# Altium PCB 第二版PCB.pcbdoc (part 1 of 2)
Units mm, origin at the board's own origin, x right, y up, seen from the top; angles counter-clockwise.
Board outline 100 x 24 mm, 4 copper layers (Top Layer, GND, VCC, Bottom Layer), stack 0.568 mm thick; 97 components, 63 nets, 363 pads, 297 vias.
Unrouted connection lines stored in the file: 80.
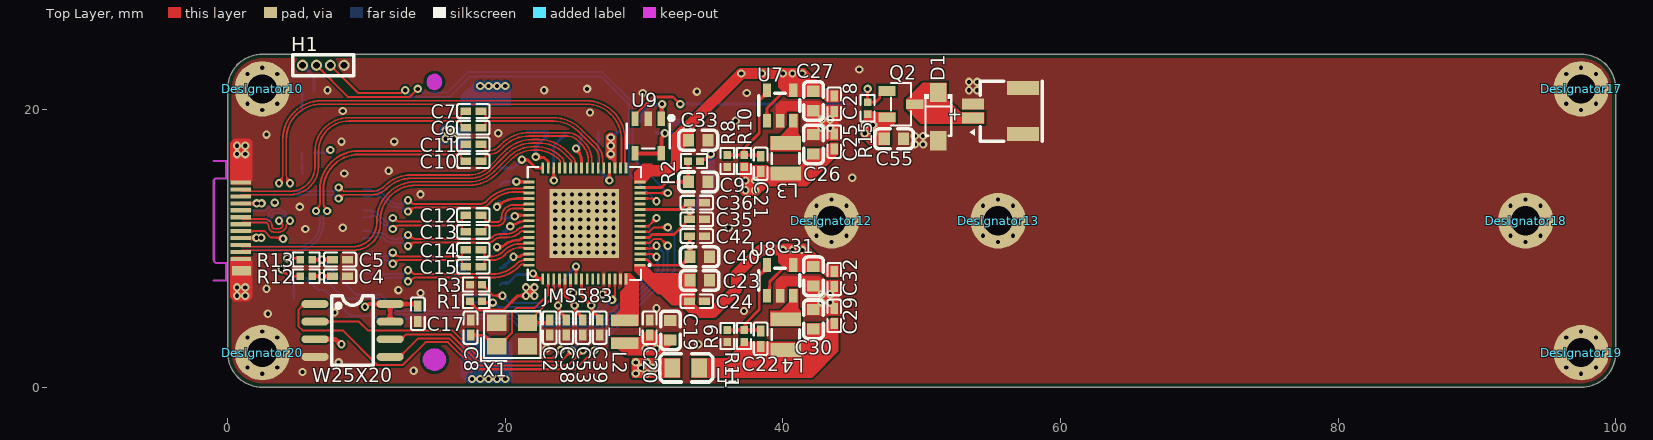
[diagram p0: Top Layer view]
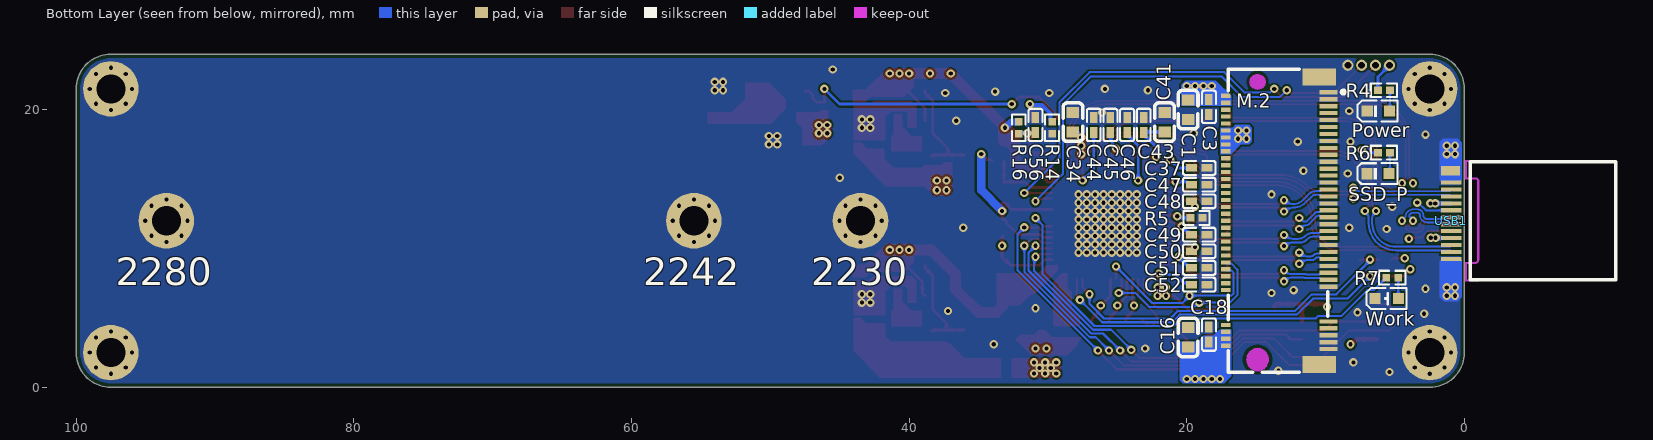
[diagram p1: Bottom Layer view, seen from below]
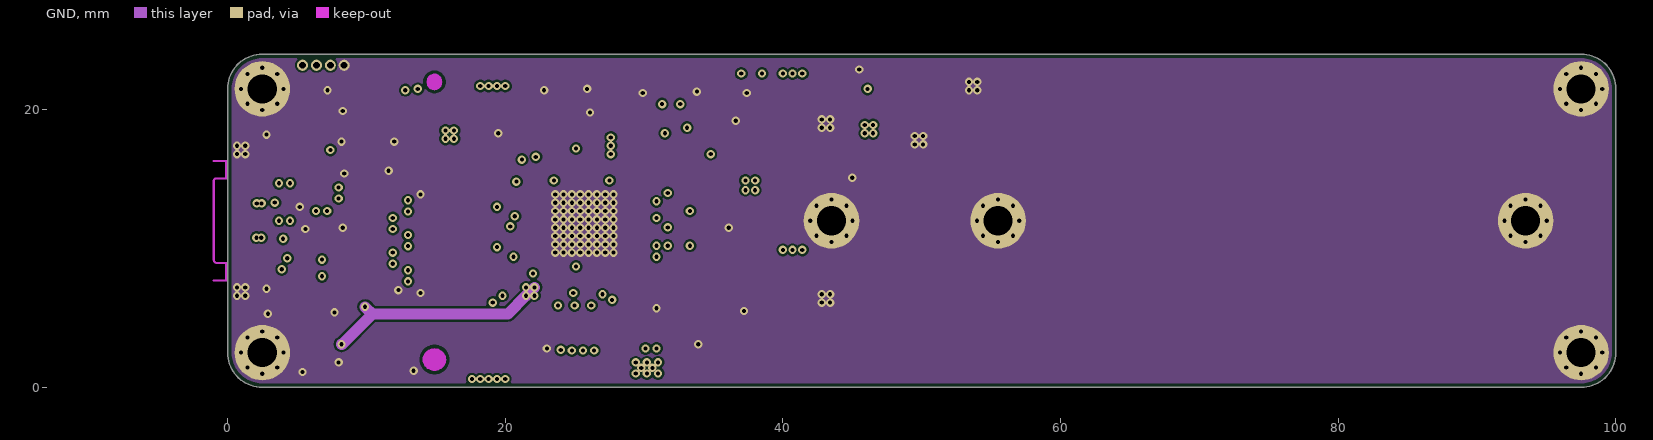
[diagram p2: GND]
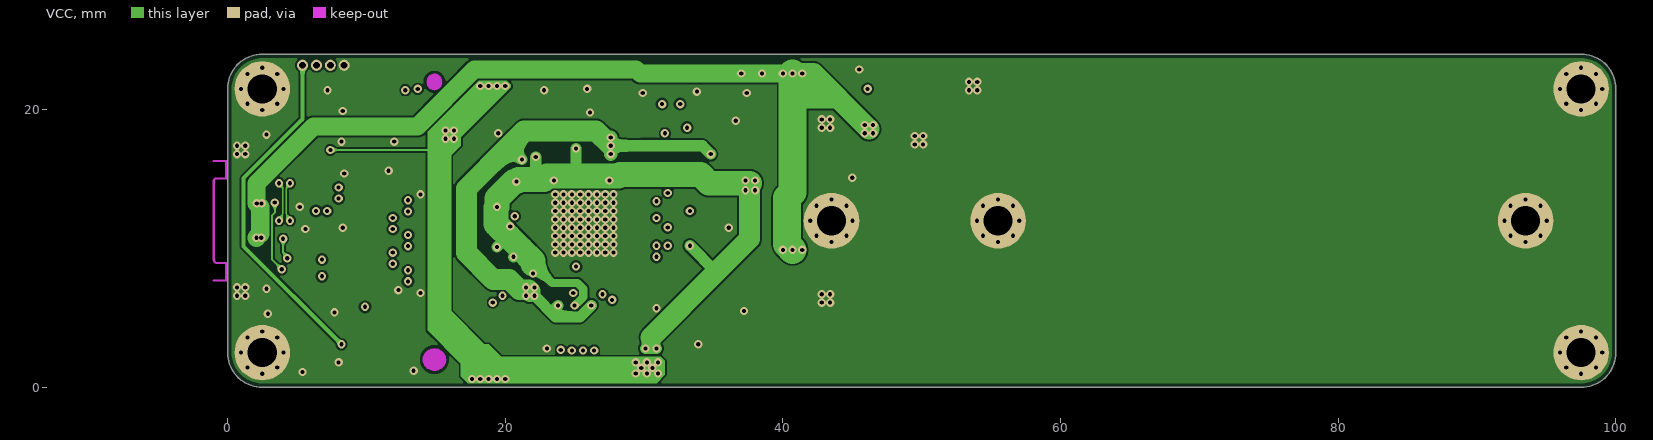
[diagram p3: VCC]

## Layer stack, top to bottom
Top Solder Mask Layer: solder mask 0.0102, Solder Resist, Dk 3.5
Top Layer: signal copper 0.035
Dielectric 1: prepreg 0.0711, PP-006, Dk 4.1
GND: signal copper 0.018
Dielectric1: dielectric 0.32, FR-4, Dk 4.8
VCC: signal copper 0.018
Dielectric 2: prepreg 0.0711, PP-006, Dk 4.1
Bottom Layer: signal copper 0.035
Bottom Solder Mask Layer: solder mask 0.0102, Solder Resist, Dk 3.5

## Board outline
0,2.5 0,21.5 cw(c2.5,21.5) 2.5,24 97.5,24 cw(c97.5,21.5) 100,21.5 100,2.5 cw(c97.5,2.5) 97.5,0 2.5,0 cw(c2.5,2.5)

## Design rules (kind name [scope] priority, off if disabled: settings)
BoardOutlineClearance copperThickness1oz_1 [All] p1: gap=0.254 ignorepadtopadclearanceinfootprint=FALSE except(0: Arc-SplitContinuation Track-SplitContinuation SMDPad-SplitContinuation THPad-SplitContinuation Via-SplitContinuation Fill-SplitContinuation Poly-SplitContinuation Region-SplitContinuation Text-SplitContinuation; 0.152: Track-CutoutEdge SMDPad-CutoutEdge THPad-CutoutEdge Via-CutoutEdge Region-CutoutEdge; 0.3: Track-OutlineEdge SMDPad-OutlineEdge THPad-OutlineEdge Via-OutlineEdge Fill-OutlineEdge Fill-CutoutEdge Poly-OutlineEdge Region-OutlineEdge Text-OutlineEdge)
BoardOutlineClearance copperThickness2oz_1 [All] p2: gap=0.254 ignorepadtopadclearanceinfootprint=FALSE except(0: Arc-SplitContinuation Track-SplitContinuation SMDPad-SplitContinuation THPad-SplitContinuation Via-SplitContinuation Fill-SplitContinuation Poly-SplitContinuation Region-SplitContinuation Text-SplitContinuation; 0.152: Track-CutoutEdge SMDPad-CutoutEdge THPad-CutoutEdge Via-CutoutEdge Region-CutoutEdge; 0.3: Track-OutlineEdge SMDPad-OutlineEdge THPad-OutlineEdge Via-OutlineEdge Fill-OutlineEdge Fill-CutoutEdge Poly-OutlineEdge Region-OutlineEdge Text-OutlineEdge)
Clearance "Stitching GND" [IsStitchingVia and InNet('GND') vs (IsVia and (Not IsStitchingVia)) Or IsPad] p1: gap=0.2 ignorepadtopadclearanceinfootprint=FALSE except(0: Arc-Text Arc-Hole Track-Text Track-Hole SMDPad-Text SMDPad-Hole THPad-Text THPad-Hole Via-Text Via-Hole Fill-Text Fill-Hole Poly-Text Poly-Hole Region-Text Region-Hole Text-Text Text-Hole)
Clearance copperThickness1oz [All] p2: gap=0.15 ignorepadtopadclearanceinfootprint=FALSE except(0: Arc-Text Arc-Hole Track-Text Track-Hole SMDPad-Via SMDPad-Text SMDPad-Hole THPad-Via THPad-Text THPad-Hole Via-Text Via-Hole Fill-Text Fill-Hole Poly-Text Poly-Hole Region-Text Region-Hole Text-Text Text-Hole; 0.12: Arc-Arc Arc-Track Arc-Via Track-Track Track-Via; 0.2: Via-Via)
ComponentClearance [All] p1: gap=0 collisioncheckmode=3 verticalgap=0.254 showdistances=FALSE
DiffPairsRouting DiffPairsRouting_90oum [InDifferentialPairClass('USB')] p1: maxlimit=0.254 minlimit=0.1 mostfreqgap=0.12 toplayer_minwidth=0.1 toplayer_maxwidth=0.381 toplayer_prefwidth=0.125 midlayer1_minwidth=0.1 midlayer1_maxwidth=0.381 midlayer1_prefwidth=0.125 midlayer2_minwidth=0.1 midlayer2_maxwidth=0.381 midlayer2_prefwidth=0.125 bottomlayer_minwidth=0.1 bottomlayer_maxwidth=0.381 bottomlayer_prefwidth=0.125 maxuncoupledlength=12.7
DiffPairsRouting DiffPairsRouting_85oum [InDifferentialPairClass('NVme')] p2: maxlimit=0.254 minlimit=0.1 mostfreqgap=0.12 toplayer_minwidth=0.1 toplayer_maxwidth=0.381 toplayer_prefwidth=0.145 midlayer1_minwidth=0.1 midlayer1_maxwidth=0.381 midlayer1_prefwidth=0.145 midlayer2_minwidth=0.1 midlayer2_maxwidth=0.381 midlayer2_prefwidth=0.145 bottomlayer_minwidth=0.1 bottomlayer_maxwidth=0.381 bottomlayer_prefwidth=0.145 maxuncoupledlength=12.7
MatchedLengths [All] p1: tolerance=2 checknetsindiffpair=TRUE checkdiffpairvsdiffpair=FALSE checkxsignals=FALSE checkothers=FALSE
PasteMaskExpansion pasteMaskExpansion [All] p1: expansion=0
PlaneConnect innerPlane [All] p1: planeconnectstyle=Direct reliefexpansion=0.508 reliefentries=4 reliefconductorwidth=0.254 reliefairgap=0.254
PolygonConnect copperRegion [All] p1: connectstyle=Direct reliefconductorwidth=0.254 reliefentries=4 polygonreliefangle="90 Angle" airgapwidth=0.254
RoutingVias viaSize [All] p1: holewidth=0.3 width=0.6 viastyle="Through Hole" minholewidth=0.3 minwidth=0.6 maxholewidth=6.3 maxwidth=10
SilkToSilkClearance [All] p1: silktosilkclearance=0
SilkToSolderMaskClearance [IsPad] p1: minsilkscreentomaskgap=0 clearancetoexposedcopper=TRUE
SolderMaskExpansion solderMaskExpansion [All] p1: expansion=0.051 istentingtop=FALSE useseparateexpansions=TRUE expansionbottom=0.051 istentingbottom=FALSE
SupplyNets "Schematic Supply Nets_5" [InNet('VCC')] p1: voltage=0.000
SupplyNets "Schematic Supply Nets_4" [InNet('M.2_3V3')] p2: voltage=0.000
SupplyNets "Schematic Supply Nets_3" [InNet('AVDDL')] p3: voltage=0.000
SupplyNets "Schematic Supply Nets_2" [InNet('GND')] p4: voltage=0.000
SupplyNets "Schematic Supply Nets_1" [InNet('VDDREG')] p5: voltage=0.000
SupplyNets "Schematic Supply Nets" [InNet('3V3')] p6: voltage=0.000
Width copperThickness1oz_2 [All] p1: maxlimit=5 minlimit=0.1 preferedwidth=0.254
24 further rules are at their usual default settings.

## Classes and differential pairs
differential pair class NVme: CLK N_P0_TX N_P1_TX P0_RX P0_TX P1_RX P1_TX
differential pair class USB: D RX1 RX2 TX1 TX2 U_TX1 U_TX2
differential pair N_P1_TX: +N_P1_TX_P -N_P1_TX_N
differential pair N_P0_TX: +N_P0_TX_P -N_P0_TX_N
differential pair U_TX2: +U_TX2_P -U_TX2_N
differential pair U_TX1: +U_TX1_P -U_TX1_N
differential pair TX2: +TX2_P -TX2_N
differential pair TX1: +TX1_P -TX1_N
differential pair RX2: +RX2_P -RX2_N
differential pair RX1: +RX1_P -RX1_N
differential pair P1_TX: +P1_TX_P -P1_TX_N
differential pair P1_RX: +P1_RX_P -P1_RX_N
differential pair P0_TX: +P0_TX_P -P0_TX_N
differential pair P0_RX: +P0_RX_P -P0_RX_N
differential pair D: +D_P -D_N
differential pair CLK: +CLK_P -CLK_N

## Components (designator, comment, footprint, x,y, rotation, side; value= is the part's Value field where it differs from the comment)
+ "ZX-SH1.0-2PWT" CONN-SMD_2P-P1.00_HX-1.0-2P-WT 55.5,19.9 r90 top (schematic designator U10)
C1 "CAP_0603" C0603 19.9,20 r270 bottom
C2 "CL05B104KB54PNC" C0402 23.2,4.3 r90 top
C3 "CL05B104KB54PNC" C0402 18.4,20.2 r90 bottom
C4 "CL05B104KB54PNC" C0402 8.1,8 r0 top
C5 "CL05B104KB54PNC" C0402 8.1,9.2 r0 top
C6 "CL05B104KB54PNC" C0402 17.7,18.7 r0 top
C7 "CL05B104KB54PNC" C0402 17.7,19.9 r0 top
C8 "CL05B104KB54PNC" C0402 17.5,4.3 r270 top
C9 "CAP_0603" C0603 33.9,14.8 r180 top
C10 "CL05B104KB54PNC" C0402 17.7,16.3 r0 top
C11 "CL05B104KB54PNC" C0402 17.7,17.5 r0 top
C12 "CL05B104KB54PNC" C0402 17.7,12.4 r180 top
C13 "CL05B104KB54PNC" C0402 17.7,11.2 r180 top
C14 "CL05B104KB54PNC" C0402 17.7,9.9 r180 top
C15 "CL05B104KB54PNC" C0402 17.7,8.7 r180 top
C16 "CAP_0603" C0603 19.9,3.6 r90 bottom
C17 "CL05B104KB54PNC" C0402 13.7,5.3 r90 top
C18 "CL05B104KB54PNC" C0402 18.4,3.8 r270 bottom
C19 "CAP_0603" C0603 31.9,4.1 r270 top
C20 "CL05B104KB54PNC" C0402 30.4,4.3 r270 top
C21 "CL05B104KB54PNC" C0402 38.4,16.1 r90 top
C22 "CL05B104KB54PNC" C0402 38.4,3.5 r90 top
C23 "CAP_0603" C0603 34,7.7 r180 top
C24 "CL05B104KB54PNC" C0402 33.8,6.2 r180 top
C25 "CL05B104KB54PNC" C0402 43.7,17.7 r270 top
C26 "CAP_0603" C0603 42.2,17.5 r270 top
C27 "CAP_0603" C0603 42.2,20.625 r90 top
C28 "CL05B104KB54PNC" C0402 43.7,20.425 r90 top
C29 "CL05B104KB54PNC" C0402 43.7,5.145 r270 top
C30 "CAP_0603" C0603 42.2,4.9 r270 top
C31 "CAP_0603" C0603 42.2,8 r90 top
C32 "CL05B104KB54PNC" C0402 43.7,7.8 r90 top
C33 "CAP_0603" C0603 33.9,17.8 r180 top
C34 "CAP_0603" C0603 28.2,19.1 r270 bottom
C35 "CL05B104KB54PNC" C0402 33.8,12.1 r180 top
C36 "CL05B104KB54PNC" C0402 33.8,13.3 r180 top
C37 "CL05B104KB54PNC" C0402 19.1,15.8 r0 bottom
C38 "CL05B104KB54PNC" C0402 24.4,4.3 r90 top
C39 "CL05B104KB54PNC" C0402 26.8,4.3 r90 top
C40 "CAP_0603" C0603 34,9.4 r180 top
C41 "CAP_0603" C0603 21.6,19.1 r270 bottom
C42 "CL05B104KB54PNC" C0402 33.8,10.9 r180 top
C43 "CL05B104KB54PNC" C0402 23.1,18.9 r270 bottom
C44 "CL05B104KB54PNC" C0402 26.7,18.9 r270 bottom
C45 "CL05B104KB54PNC" C0402 25.5,18.9 r270 bottom
C46 "CL05B104KB54PNC" C0402 24.3,18.9 r270 bottom
C47 "CL05B104KB54PNC" C0402 19.1,14.6 r0 bottom
C48 "CL05B104KB54PNC" C0402 19.1,13.4 r0 bottom
C49 "CL05B104KB54PNC" C0402 19.1,11 r0 bottom
C50 "CL05B104KB54PNC" C0402 19.1,9.8 r0 bottom
C51 "CL05B104KB54PNC" C0402 19.1,8.6 r0 bottom
C52 "CL05B104KB54PNC" C0402 19.1,7.4 r0 bottom
C53 "CL05B104KB54PNC" C0402 25.6,4.3 r90 top
C55 "CAP_0603" C0603 48,17.9 r180 top
C56 "CL05B104KB54PNC" C0402 30.9,18.9 r90 bottom
D1 "FR107W_C18199114" SOD-123FL_L2.7-W1.8-LS3.8-RD 51.2,19.5 r270 top
Designator10 "Comment" M2_HOLE 2.5,21.5 r0 top locked
Designator12 "Comment" M2_HOLE 43.5,12 r0 top locked
Designator13 "Comment" M2_HOLE 55.5,12 r0 top locked
Designator17 "Comment" M2_HOLE 97.5,21.5 r0 top locked
Designator18 "Comment" M2_HOLE 93.5,12 r0 top locked
Designator19 "Comment" M2_HOLE 97.5,2.5 r0 top locked
Designator20 "Comment" M2_HOLE 2.5,2.5 r0 top locked
H1 "ZX-PZ1.0-1-4PZZ" HDR-TH_ZX-PZ1.0-1-4PZZ 6.9,23.2 r0 top
JMS583 "JMS583" QFN-64_L8.0-W8.0-P0.40-TL-EP6.0 25.7,11.8 r180 top locked (schematic designator U6)
L1 "BLM21PG600SN1D" L0805 33,1.4 r180 top
L2 "FTC252010S4R7MBCA" IND-SMD_L2.5-W2.0-VLS252012CX-150M 28.6,4 r90 top
L3 "FTC252012S2R2MBCA" IND-SMD_L2.5-W2.0_MHCHL2520 40.2,16.5 r90 top
L4 "FTC252012S2R2MBCA" IND-SMD_L2.5-W2.0_MHCHL2520 40.2,3.8 r90 top
M.2 "91302-225-067RCM" CONN-SMD_91302-225-067RCM 13.5,12 r270 bottom locked (schematic designator U1)
Power "XL-1608PGC-06" LED0603-RD_GREEN 6.2,19.9 r180 bottom (schematic designator U2)
Q2 "HL3401A" SOT-23-3_L2.9-W1.3-P1.90-LS2.4-BR 48.5,20.4 r180 top
R1 "0402WGF1002TCE" R0402 17.9,6.2 r180 top
R2 "0402WGF1002TCE" R0402 33.6,16.3 r180 top
R3 "0402WGF1002TCE" R0402 17.9,7.4 r180 top
R4 "0402WGF1002TCE" R0402 5.8,21.4 r180 bottom
R5 "0402WGF1002TCE" R0402 19.3,12.2 r180 bottom
R6 "0402WGF1002TCE" R0402 5.8,16.9 r180 bottom
R7 "0402WGF1002TCE" R0402 5.2,7.9 r180 bottom
R8 "0402WGF1002TCE" R0402 36,16.3 r90 top
R9 "0402WGF1002TCE" R0402 36,3.7 r90 top
R10 "0402WGF1002TCE" R0402 37.2,16.3 r270 top
R11 "0402WGF1002TCE" R0402 37.2,3.7 r270 top
R12 "0402WGF1002TCE" R0402 5.667,8 r0 top
R13 "0402WGF1002TCE" R0402 5.667,9.2 r0 top
R14 "0402WGF4702TCE" R0402 29.7,18.7 r90 bottom
R15 "0402WGF1002TCE" R0402 46.1,20.1 r90 top
R16 "0402WGF1002TCE" R0402 32.1,18.7 r270 bottom
SSD_P "XL-1608PGC-06" LED0603-RD_GREEN 6.219,15.389 r180 bottom (schematic designator U3)
U7 "ETA3409S2F" SOT-23-5_L2.9-W1.6-P0.95-LS2.8-BL 39.8,20.3 r0 top
U8 "ETA3409S2F" SOT-23-5_L2.9-W1.6-P0.95-LS2.8-BL 39.8,7.7 r0 top
U9 "TMP709AIDBVR(UMW)" SOT-23-5_L3.0-W1.5-P0.95-LS2.8-BL 30.3,18.1 r180 top
USB1 "U261-241N-4BS60" USB-TYPE-C-SMD_U261-241N-4BS60 0.975,12 r90 bottom locked
W25X20 "W25X20CLSNIG" SOIC-8_L5.0-W4.0-P1.27-LS6.0-BL 9,4.1 r270 top (schematic designator U4)
Work "XL-1608UBC-06A" LED0603-R-RD 5.6,6.4 r180 bottom (schematic designator U5)
X1 "XL2EL89CSI-111YLC-25M" CRYSTAL-SMD_4P-L3.2-W2.5-BL 20.5,3.8 r0 top

## Footprints (in the part's own frame and the unit in brackets; to place one, negate y for a bottom-side part, rotate by r counter-clockwise, add the part's x,y. Pads: shape width x height; smd on the part's side, far side on the other; paste and mask are expansions set on the pad)
C0402 [mm]
  rect 0.79x0.54 smd paste-100 mask+0.051: 1(-0.545,0) 2(0.545,0)
  silkscreen extent -1.17,-0.5 1.17,0.5
C0603 [mm]
  rect 0.8x0.9 smd: 1(-0.7,0) 2(0.7,0)
  silkscreen extent -1.39,-0.71 1.39,0.71
CONN-SMD_2P-P1.00_HX-1.0-2P-WT [mm]
  rect 0.8x1.6 smd paste+0 mask+0.05: 1(-0.5,1.8) 2(0.5,1.8)
  rect 1x2.3 smd paste+0 mask+0.05: 3(1.65,-1.8) 4(-1.65,-1.8)
  silkscreen extent -2.16,-3.18 2.16,2.05
CONN-SMD_91302-225-067RCM [mm]
  rect 0.3x1.3 smd: 1(-9.25,3.7) 3(-8.75,3.7) 5(-8.25,3.7) 7(-7.75,3.7) 9(-7.25,3.7) 11(-6.75,3.7) 13(-6.25,3.7) 15(-5.75,3.7) 17(-5.25,3.7) 19(-4.75,3.7) 21(-4.25,3.7) 23(-3.75,3.7) 25(-3.25,3.7) 27(-2.75,3.7) 29(-2.25,3.7) 31(-1.75,3.7) 33(-1.25,3.7) 35(-0.75,3.7) 37(-0.25,3.7) 39(0.25,3.7) 41(0.75,3.7) 43(1.25,3.7) 45(1.75,3.7) 47(2.25,3.7) 49(2.75,3.7) 51(3.25,3.7) 53(3.75,3.7) 55(4.25,3.7) 57(4.75,3.7) 67(7.25,3.7) 69(7.75,3.7) 71(8.25,3.7) 73(8.75,3.7) 75(9.25,3.7)
  rect 0.3x0.7 smd: 2(-9,-3.7) 4(-8.5,-3.7) 6(-8,-3.7) 8(-7.5,-3.7) 10(-7,-3.7) 12(-6.5,-3.7) 14(-6,-3.7) 16(-5.5,-3.7) 18(-5,-3.7) 20(-4.5,-3.7) 22(-4,-3.7) 24(-3.5,-3.7) 26(-3,-3.7) 28(-2.5,-3.7) 30(-2,-3.7) 32(-1.5,-3.7) 34(-1,-3.7) 36(-0.5,-3.7) 38(0,-3.7) 40(0.5,-3.7) 42(1,-3.7) 44(1.5,-3.7) 46(2,-3.7) 48(2.5,-3.7) 50(3,-3.7) 52(3.5,-3.7) 54(4,-3.7) 56(4.5,-3.7) 58(5,-3.7) 68(7.5,-3.7) 70(8,-3.7) 72(8.5,-3.7) 74(9,-3.7)
  rect 1.2x2.4 smd: 76(-10.35,3.05) 77(10.35,3.05)
  Board Outline Layer board cut-out: -10,-1.95 -10.21,-1.908 -10.389,-1.789 -10.508,-1.611 -10.55,-1.4 -10.55,-1.4 -10.508,-1.19 -10.389,-1.011 -10.21,-0.892 -10,-0.85 -10,-0.85 -9.789,-0.892 -9.611,-1.011 -9.492,-1.19 -9.45,-1.4 -9.45,-1.4 -9.492,-1.611 -9.611,-1.789 -9.789,-1.908 -10,-1.95
  Board Outline Layer board cut-out: 9.2,-1.4 9.261,-1.706 9.434,-1.966 9.694,-2.139 10,-2.2 10,-2.2 10.306,-2.139 10.566,-1.966 10.739,-1.706 10.8,-1.4 10.8,-1.4 10.739,-1.094 10.566,-0.834 10.306,-0.661 10,-0.6 10,-0.6 9.694,-0.661 9.434,-0.834 9.261,-1.094 9.2,-1.4
  Board Outline Layer circle w0.7: c-10,-1.4 r0.2
  Board Outline Layer circle w0.005: c-10,-1.4 r0.55
  Board Outline Layer circle w0.8: c10,-1.4 r0.4
  silkscreen extent -10.92,-3.5 10.92,4.9
CRYSTAL-SMD_4P-L3.2-W2.5-BL [mm]
  rect 1.4x1.2 smd: 1(-1.1,-0.85) 2(1.1,-0.85) 3(1.1,0.85) 4(-1.1,0.85)
  silkscreen extent -2.26,-1.91 2.03,1.68
HDR-TH_ZX-PZ1.0-1-4PZZ [mm]
  round 0.8 hole 0.5: 1(-1.5,0) 2(-0.5,0) 3(0.5,0) 4(1.5,0)
  silkscreen extent -2.2,-0.75 2.2,0.75
IND-SMD_L2.5-W2.0-VLS252012CX-150M [mm]
  rect 0.85x2 smd: 1(-0.83,0) 2(0.83,0)
  silkscreen extent -0.29,-1.1 0.29,1.1
IND-SMD_L2.5-W2.0_MHCHL2520 [mm]
  rect 1x2.2 smd: 1(-1.1,0) 2(1.1,0)
  silkscreen extent -0.37,-1 0.37,1
L0805 [mm]
  rect 1.133x1.377 smd paste-100 mask+0.051: 1(-0.966,0) 2(0.966,0)
  silkscreen extent -1.95,-1.02 1.86,1.02
LED0603-R-RD [mm]
  rect 0.8x0.8 smd: 1(0.851,0) 2(-0.851,0)
  silkscreen extent -1.44,-0.75 1.44,0.75
LED0603-RD_GREEN [mm]
  rect 0.8x0.8 smd: 1(-0.799,-0.003) 2(0.799,0.003)
  silkscreen extent -1.49,-0.75 1.39,0.76
M2_HOLE [mm]
  round 4 hole 2.1: 16(0,0)
QFN-64_L8.0-W8.0-P0.40-TL-EP6.0 [mm]
  rect 0.8x0.2 smd paste-100 mask+0.051: 1(-4,3) 2(-4,2.6) 3(-4,2.2) 4(-4,1.8) 5(-4,1.4) 6(-4,1) 7(-4,0.6) 8(-4,0.2) 9(-4,-0.2) 10(-4,-0.6) 11(-4,-1) 12(-4,-1.4) 13(-4,-1.8) 14(-4,-2.2) 15(-4,-2.6) 16(-4,-3) 33(4,-3) 34(4,-2.6) 35(4,-2.2) 36(4,-1.8) 37(4,-1.4) 38(4,-1) 39(4,-0.6) 40(4,-0.2) 41(4,0.2) 42(4,0.6) 43(4,1) 44(4,1.4) 45(4,1.8) 46(4,2.2) 47(4,2.6) 48(4,3)
  rect 0.2x0.8 smd paste-100 mask+0.051: 17(-3,-4) 18(-2.6,-4) 19(-2.2,-4) 20(-1.8,-4) 21(-1.4,-4) 22(-1,-4) 23(-0.6,-4) 24(-0.2,-4) 25(0.2,-4) 26(0.6,-4) 27(1,-4) 28(1.4,-4) 29(1.8,-4) 30(2.2,-4) 31(2.6,-4) 32(3,-4) 49(3,4) 50(2.6,4) 51(2.2,4) 52(1.8,4) 53(1.4,4) 54(1,4) 55(0.6,4) 56(0.2,4) 57(-0.2,4) 58(-0.6,4) 59(-1,4) 60(-1.4,4) 61(-1.8,4) 62(-2.2,4) 63(-2.6,4) 64(-3,4)
  rect 5x5 smd paste-100 mask+0.051: 65(0,0)
  silkscreen extent -4.77,-4.08 4.08,4.08
R0402 [mm]
  rect 0.566x0.54 smd paste-100 mask+0.051: 1(-0.433,0) 2(0.433,0)
  silkscreen extent -0.94,-0.5 0.94,0.5
SOD-123FL_L2.7-W1.8-LS3.8-RD [mm]
  rect 1.4x1.2 smd: 1(-1.735,0) 2(1.735,0)
  silkscreen extent -1.6,-1 1.38,1
SOIC-8_L5.0-W4.0-P1.27-LS6.0-BL [mil]
  oval 22.38x76.78 smd: 1(-75,-106.5) 2(-25,-106.5) 3(25,-106.5) 4(75,-106.5) 5(75,106.5) 6(25,106.5) 7(-25,106.5) 8(-75,106.5)
  silkscreen extent -98,-59 98,59
SOT-23-3_L2.9-W1.3-P1.90-LS2.4-BR [mm]
  rect 1.25x0.7 smd paste+0 mask+0.051: 1(1,-0.95) 2(1,0.95) 3(-1,0)
  silkscreen extent -0.73,-1.53 0.73,1.53
SOT-23-5_L2.9-W1.6-P0.95-LS2.8-BL [mm]
  rect 0.6x1 smd paste+0 mask+0.05: 1(-0.95,-1.1) 2(0,-1.1) 3(0.95,-1.1) 4(0.95,1.1) 5(-0.95,1.1)
  silkscreen extent -1.52,-0.7 1.4,0.89
SOT-23-5_L3.0-W1.5-P0.95-LS2.8-BL [mm]
  rect 0.532x1.045 smd: 1(-0.95,-1.25) 2(0,-1.25) 3(0.95,-1.25) 4(0.95,1.25) 5(-0.95,1.25)
  silkscreen extent -1.82,-1.45 1.55,0.9
USB-TYPE-C-SMD_U261-241N-4BS60 [mm]
  rect 0.7x1.4 smd far side paste+0 mask+0.05: 1(-3.6,0.025)
  rect 0.7x1.4 smd paste+0 mask+0.05: 2(3.6,0.025)
  rect 0.3x1.5 smd paste+0 mask+0.05: A1(2.75,-0.025) A2(2.25,-0.025) A3(1.75,-0.025) A4(1.25,-0.025) A5(0.75,-0.025) A6(0.25,-0.025) A7(-0.25,-0.025) A8(-0.75,-0.025) A9(-1.25,-0.025) A10(-1.75,-0.025) A11(-2.25,-0.025) A12(-2.75,-0.025)
  rect 0.3x1.5 smd far side paste+0 mask+0.05: B1(-2.75,-0.025) B2(-2.25,-0.025) B3(-1.75,-0.025) B4(-1.25,-0.025) B5(-0.75,-0.025) B6(-0.25,-0.025) B7(0.25,-0.025) B8(0.75,-0.025) B9(1.25,-0.025) B10(1.75,-0.025) B11(2.25,-0.025) B12(2.75,-0.025)
  Board Outline Layer lines w0.15: 2.86,-1.975 ccw(c2.86,-1.785) 3.05,-1.785 ; 2.86,-1.975 ccw(c2.86,-1.785) 3.05,-1.785 ; 2.86,-1.975 -2.741,-1.975 2.86,-1.975 ; 3.05,-1.785 3.05,-1.075 ; 3.05,-1.785 3.05,-1.075 ; -3.05,-1.719 ccw(c-2.794,-1.719) -2.794,-1.975 cw(c-2.794,-1.719) -3.05,-1.719 ; -3.05,-1.719 -3.05,-1.7 ; -3.05,-1.719 -3.05,-1.7 ; -3.05,-1.7 -3.05,-1.075 ; -3.05,-1.7 -3.05,-1.075 ; -4.3,-1.075 -4.3,-1.975 -4.3,-1.075 ; -4.3,-1.075 -3.05,-1.075 ; -4.3,-1.075 -3.05,-1.075 ; 3.05,-1.075 4.3,-1.075 ; 3.05,-1.075 4.3,-1.075 ; 4.3,-1.075 4.3,-1.975 4.3,-1.075
  silkscreen extent -4.25,-11.89 4.25,-1.38

## Via types
v1: diameter 0.6, hole 0.3, Top Layer to Bottom Layer, tented both sides, 297 vias

## Nets (pads, with @x,y where several pads share a name; then routed paths per layer and width w, separated by ;. In a path a pad name is that pad's centre, name@x,y a point inside that pad or via, vN(x,y) a via of type N, cw(c..) or ccw(c..) an arc to the next point about the centre after c; other vN are vias at no path point)
3V3: C22.1 C29.2 C30.2 L1.1 L4.1 R11.2
$1N3363: R6.2 SSD_P.2 | length 1.5
  Bottom Layer w0.15: R6.2@5.367,16.9 5.367,15.445 SSD_P.2@5.419,15.392
$1N3561: R7.2 Work.1 | length 1.5
  Bottom Layer w0.15: Work.1@4.749,6.4 4.767,6.418 R7.2@4.767,7.9
$1N4495: JMS583.39 R5.1 | length 2
  Top Layer w0.2: v1(20.69,12.322) 20.807,12.372 cw(c20.941,12.059) 20.941,12.4 JMS583.39@21.7,12.4
  Bottom Layer w0.2: R5.1@19.733,12.2 20.395,12.2 ccw(c20.395,12.617) v1(20.69,12.322)
$1N10279: C22.2 R9.2 R11.1 U8.5 | length 7.8
  Top Layer w0.2: R9.2@36,4.133 R11.1@37.2,4.133 ; C22.2@38.4,4.045 38.312,4.133 R11.1@37.2,4.133 ; U8.5@38.85,8.8 38.85,8.6 38.3,8.05 38.3,5.6 37.298,4.598 37.298,4.231 R11.1@37.2,4.133
$1N10317: L4.2 U8.3
$1N10953: Power.2 R4.2 | length 1.5
  Bottom Layer w0.15: R4.2@5.367,21.4 5.367,19.937 Power.2@5.401,19.903
$1N11538: L3.2 U7.3
$1N11540: C21.2 R8.2 R10.1 U7.5 | length 7.8
  Top Layer w0.2: R8.2@36,16.733 R10.1@37.2,16.733 ; C21.2@38.4,16.645 38.312,16.733 R10.1@37.2,16.733 ; U7.5@38.85,21.4 38.85,21.2 38.3,20.65 38.3,18.3 37.2,17.2 R10.1@37.2,16.733
$1N22897: R14.2 U9.1 | length 3.5
  Top Layer w0.3: U9.1@31.25,19.35 31.275,19.375 31.275,20.375 v1(31.3,20.4)
  Bottom Layer w0.3: R14.2@29.7,19.146 29.82,19.266 29.82,19.72 30.443,20.343 31.243,20.343 v1(31.3,20.4)
$1N22946: C56.1 R16.2 U9.4 U9.5 | length 4.7
  Top Layer w0.3: U9.4@29.35,16.85 U9.5@31.25,16.85 31.25,17.969 31.5,18.219 v1(31.5,18.3)
  Bottom Layer w0.3: C56.1@30.9,18.355 30.944,18.311 32.056,18.311 R16.2@32.1,18.267
$1N23051: Q2.1 R15.2 U9.3 | length 21.1
  Top Layer w0.2: U9.3@29.35,19.35 29.35,19.607 30.664,20.92 32.08,20.92 v1(32.6,20.4) ; v1(46.1,21.5) R15.2@46.1,20.533 46.67,20.533 46.975,20.838 46.975,21.1 47.225,21.35 Q2.1@47.5,21.35
  Bottom Layer w0.2: v1(32.6,20.4) 45,20.4 v1(46.1,21.5)
$1N23334: +.1 D1.1 Q2.3
AVDDL: C19.2 C20.2 C21.1 C25.2 C26.2 C40.2 C41.2 C42.2 C43.2 C44.2 C45.2 C46.2 C47.2 C48.2 C49.2 C50.2 C51.2 C52.2 C53.2 JMS583.2 JMS583.20 JMS583.25 JMS583.30 JMS583.31 JMS583.33 JMS583.36 JMS583.40 JMS583.43 JMS583.46 JMS583.49 JMS583.53 L2.1 L3.1 R10.2 | length 97.1
  Top Layer w0.2: v1(19.4,10.1) 19.675,10.1 ccw(c19.674,10.3) 19.807,10.151 cw(c21.029,8.794) 20.989,10.619 ccw(c20.983,10.819) 21.123,10.677 cw(c21.3,10.5) 21.27,10.748 JMS583.43@21.699,10.8 ; v1(19.4,13) cw(c20.849,11.551) 20.849,13.6 JMS583.36@21.7,13.6 ; v1(20.364,11.592) 20.873,11.834 cw(c21.607,10.293) 21.199,11.95 21.4,12 JMS583.40@21.7,12 ; v1(20.6,9.4) 20.966,9.4 ccw(c20.965,9.6) 21.113,9.466 cw(c21.3,9.3) 21.27,9.548 JMS583.46@21.699,9.6 ; v1(20.8,14.82) 20.8,14.8 JMS583.33@21.7,14.8 ; v1(22,8.2) 22.4,7.8 JMS583.49@22.7,7.8 ; v1(22.2,16.6) 22.246,16.554 22.8,16.554 23.1,16.253 JMS583.31@23.1,15.8 ; v1(23.5,14.9) JMS583.30@23.5,15.8 ; JMS583.53@24.3,7.8 24.3,6.6 v1(25,5.9) 25.077,5.823 25.077,5.494 25.6,4.97 C53.2@25.6,4.845 ; v1(25.1,17.2) cw(c24.134,16.234) 25.5,16.234 JMS583.25@25.5,15.8 ; v1(27.5,14.9) JMS583.20@27.5,15.8 ; JMS583.2@29.7,9.2 30.2,9.2 30.6,8.8 32.7,8.8 32.95,9.05 33,9.05 33.3,9.35 C40.2@33.3,9.4 33.3,10.855 C42.2@33.255,10.9
  VCC w0.6: v1(22,8.2) 22,8.9 23.38,7.52 25.198,7.52 25.62,7.098 25.62,6.502 25.198,6.08 25.18,6.08 v1(25,5.9)
  VCC w0.8: 19.35,11.75 19.508,11.592 ; v1(19.4,10.1) 20.15,10.85 20.25,10.85 ; v1(20.6,9.4) 21.15,9.95 ; v1(22.2,16.6) 22.2,15.56 22.78,14.98 ; v1(25.1,17.2) 25.1,15.32 25.2,15.22 ; v1(30.1,2.8) v1(30.9,2.8) ; v1(33.3,10.2) 35.15,8.35 35.15,8.25
  VCC w1.5: 30.5,3.6 35.15,8.25 37.6,10.7 37.6,14.7
  VCC w1.8: 19.35,11.75 v1@19.35,12.95 ; v1(19.4,13) 19.4,13.6 20.62,14.82 v1(20.8,14.82) 20.96,14.98 22.78,14.98 23.02,15.22 25.2,15.22 28.17,15.22 28.27,15.32 34.067,15.32 34.687,14.7 37.6,14.7 ; 19.508,11.592 20.25,10.85 21.15,9.95 22,9.1 22,8.9
  Bottom Layer w0.2: v1(19.4,13) cw(c19.774,13) 19.51,13.264 C48.2@19.645,13.4 ; C52.2@19.645,7.4 19.762,7.517 20.217,7.517 20.823,8.123 21.923,8.123 v1(22,8.2) ; C51.2@19.645,8.6 ccw(c19.645,8.974) 19.91,8.71 v1(20.6,9.4) ; C49.2@19.645,11 ccw(c19.645,11.307) 19.862,11.09 v1(20.364,11.592) ; C47.2@19.645,14.6 cw(c20.176,14.069) 20.176,14.82 v1(20.8,14.82) ; C41.2@21.6,18.4 C43.2@23.055,18.4 ; v1(22.2,16.6) 22.2,17.33 23.055,18.185 C43.2@23.055,18.4 ; C43.2@23.1,18.355 C43.2@23.055,18.4 ; v1(23.5,14.9) 23.5,17.43 24.3,18.23 C46.2@24.3,18.355 ; v1(25.1,17.2) ccw(c24.134,18.166) 25.5,18.166 C45.2@25.5,18.355 ; C44.2@26.7,18.355 26.7,15.7 v1(27.5,14.9)
  other v1: 37.3,14.2 38,14.2 37.3,14.9 38,14.9
CC1: C4.1 JMS583.62 R12.2 | length 26
  Top Layer w0.15: R12.2@6.1,8 v1(6.8,8) C4.1@7.555,8 ; v1(27.7,6.3) 27.7,6.422 27.9,6.622 JMS583.62@27.9,7.8
  Bottom Layer w0.15: v1(6.8,8) 8.4,6.4 10.9,6.4 12.065,5.235 20.515,5.235 21.06,4.69 26.09,4.69 v1(27.7,6.3)
CC2: C5.1 JMS583.61 R13.2 | length 25.9
  Top Layer w0.15: R13.2@6.1,9.2 v1(6.8,9.2) C5.1@7.555,9.2 ; v1(27,6.7) 27.5,7.2 JMS583.61@27.5,7.8
  Bottom Layer w0.15: v1(6.8,9.2) 6.8,9.132 9.232,6.7 11,6.7 12.195,5.505 20.627,5.505 21.172,4.96 25.96,4.96 27,6 v1(27,6.7)
CLK_N: JMS583.47 M.2.53 | length 12.4
  Top Layer w0.14: v1(13,8.43) cw(c13,8.129) 13.212,8.342 13.32,8.235 ccw(c13.5,8.415) 13.5,8.16 19.042,8.16 ccw(c19.042,10.7) 20.838,8.904 20.911,8.977 cw(c21.28,8.608) 21.28,9.13 ccw(c21.28,9.25) 21.365,9.165 cw(c21.45,9.081) 21.45,9.2 JMS583.47@21.7,9.2
  Bottom Layer w0.14: M.2.53@9.8,8.25 10.215,8.25 cw(c10.215,8.045) 10.36,8.19 ccw(c10.505,8.335) 10.505,8.13 11.386,8.13 ccw(c11.386,8.181) 11.422,8.145 cw(c11.459,8.109) 11.459,8.16 12.497,8.16 ccw(c12.497,8.621) 12.823,8.295 12.928,8.4 cw(c13,8.329) v1(13,8.43)
CLK_P: JMS583.48 M.2.55 | length 12.4
  Top Layer w0.14: v1(13,7.63) ccw(c13,7.931) v1@13.212,7.718 ; v1@13.212,7.718 13.32,7.825 cw(c13.5,7.645) 13.5,7.9 19.042,7.9 ccw(c19.042,10.7) 21.022,8.72 21.095,8.793 cw(c21.28,8.608) 21.28,8.87 cw(c21.28,8.75) 21.365,8.835 ccw(c21.45,8.92) 21.45,8.8 JMS583.48@21.7,8.8
  Bottom Layer w0.14: M.2.55@9.8,7.75 10.215,7.75 ccw(c10.215,7.955) 10.36,7.81 cw(c10.505,7.665) 10.505,7.87 11.494,7.87 ccw(c11.494,7.921) 11.53,7.885 cw(c11.566,7.849) 11.566,7.9 12.497,7.9 cw(c12.497,7.439) 12.823,7.765 12.928,7.66 ccw(c13,7.731) v1(13,7.63)
D_N: JMS583.17 USB1.A7 USB1.B7 | length 44
  Top Layer w0.125: USB1.B7@1,12.25 ccw(c1.127,12.25) 1.127,12.122 2.678,12.122 cw(c2.678,11.6) 3.2,11.6 ccw(c3.375,11.6) 3.375,11.425 3.699,11.425 ccw(c3.699,11.703) 3.896,11.507 3.941,11.551 ccw(c3.852,11.64) 3.977,11.64 ccw(c3.852,11.64) 3.941,11.728 3.722,11.947 cw(c3.775,12) v1(3.7,12) ; v1(3.7,14.7) cw(c3.775,14.7) 3.722,14.753 ccw(c3.105,15.37) 3.978,15.37 3.977,17.86 cw(c6.763,17.86) 6.763,20.645 25.837,20.645 cw(c25.837,17.86) 28.622,17.86 28.622,16.232 ccw(c28.755,16.232) 28.661,16.139 cw(c28.568,16.045) 28.7,16.045 JMS583.17@28.7,15.8
  VCC w0.125: v1(3.7,12) cw(c3.775,12) 3.722,12.053 ccw(c3.105,12.67) 3.977,12.67 3.978,14.195 ccw(c3.504,14.195) 3.839,14.53 3.722,14.647 cw(c3.775,14.7) v1(3.7,14.7)
  Bottom Layer w0.125: USB1.A7@1,11.75 cw(c1.127,11.75) 1.127,11.877 2.677,11.877 ccw(c2.677,12.4) 3.2,12.4 cw(c3.375,12.4) 3.375,12.575 3.699,12.575 cw(c3.699,12.297) 3.896,12.493 3.941,12.449 cw(c3.852,12.36) 3.977,12.36 cw(c3.852,12.36) 3.941,12.272 3.722,12.053 ccw(c3.775,12) v1(3.7,12)
D_P: JMS583.18 USB1.A6 USB1.B6 | length 44
  Top Layer w0.125: USB1.B6@1,11.75 cw(c1.127,11.75) 1.127,11.877 2.678,11.877 cw(c2.678,11.6) 2.955,11.6 ccw(c3.375,11.6) 3.375,11.18 3.699,11.18 ccw(c3.699,11.703) 4.069,11.333 4.15,11.414 ccw(c3.975,11.589) 4.222,11.589 cw(c4.47,11.589) 4.295,11.764 4.478,11.947 ccw(c4.425,12) v1(4.5,12) ; v1(4.5,14.7) ccw(c4.425,14.7) 4.478,14.753 cw(c5.095,15.37) 4.223,15.37 4.222,17.86 cw(c6.762,17.86) 6.762,20.4 25.837,20.4 cw(c25.837,17.86) 28.377,17.86 28.377,16.232 cw(c28.245,16.232) 28.339,16.139 ccw(c28.432,16.045) 28.3,16.045 JMS583.18@28.3,15.8
  VCC w0.125: v1(4.5,12) ccw(c4.425,12) 4.478,12.053 cw(c5.095,12.67) 4.222,12.67 4.223,14.195 cw(c4.696,14.195) 4.361,14.53 4.478,14.647 ccw(c4.425,14.7) v1(4.5,14.7)
  Bottom Layer w0.125: USB1.A6@1,12.25 ccw(c1.127,12.25) 1.127,12.122 2.677,12.122 ccw(c2.677,12.4) 2.955,12.4 cw(c3.375,12.4) 3.375,12.82 3.699,12.82 cw(c3.699,12.297) 4.069,12.667 4.15,12.586 cw(c3.975,12.411) 4.222,12.411 ccw(c4.47,12.411) 4.295,12.236 4.478,12.053 cw(c4.425,12) v1(4.5,12)
GND: +.2 +.3 +.4 C1.2 C2.1 C3.1 C4.2 C5.2 C8.1 C9.1 C16.2 C17.1 C18.1 C19.1 C20.1 C23.1 C24.1 C25.1 C26.1 C27.1 C28.1 C29.1 C30.1 C31.1 C32.1 C33.1 C34.1 C35.1 C36.1 C37.1 C38.1 C39.1 C40.1 C41.1 C42.1 C43.1 C44.1 C45.1 C46.1 C47.1 C48.1 C49.1 C50.1 C51.1 C52.1 C53.1 C55.1 C56.2 D1.2 Designator10.16 Designator12.16 Designator13.16 Designator17.16 Designator18.16 Designator19.16 Designator20.16 H1.4 JMS583.60 JMS583.63 JMS583.65 M.2.1 M.2.3 M.2.9 M.2.15 M.2.21 M.2.27 M.2.33 M.2.39 M.2.45 M.2.51 M.2.57 M.2.71 M.2.73 M.2.75 M.2.76 M.2.77 Power.1 R3.2 R5.2 R8.1 R9.1 R14.1 SSD_P.1 U7.2 U8.2 U9.2 USB1.1 USB1.2 USB1.A1 USB1.A12 USB1.B1 USB1.B12 W25X20.4 Work.2 X1.2 X1.4
  other v1: 2.5,0.975 97.5,0.975 5.4,1.1 13.4,1.2 1.422,1.422 3.578,1.422 96.422,1.422 98.578,1.422 8,1.8 0.975,2.5 4.025,2.5 95.975,2.5 99.025,2.5 23,2.8 33.9,3.1 1.422,3.578 3.578,3.578 96.422,3.578 98.578,3.578 2.5,4.025 97.5,4.025 2.9,5.3 7.7,5.4 37.2,5.5 30.9,5.7 42.8,6.1 43.4,6.1 0.675,6.6 1.275,6.6 42.8,6.7 43.4,6.7 13.9,6.8 12.3,7 2.8,7.1 0.675,7.2 1.275,7.2 23.6,9.7 24.2,9.7 24.8,9.7 25.4,9.7 26,9.7 26.6,9.7 27.2,9.7 27.8,9.7 23.6,10.3 24.2,10.3 24.8,10.3 25.4,10.3 26,10.3 26.6,10.3 27.2,10.3 27.8,10.3 43.5,10.475 55.5,10.475 93.5,10.475 23.6,10.9 24.2,10.9 24.8,10.9 25.4,10.9 26,10.9 26.6,10.9 27.2,10.9 27.8,10.9 42.422,10.922 44.578,10.922 54.422,10.922 56.578,10.922 92.422,10.922 94.578,10.922 5.6,11.4 8.3,11.5 23.6,11.5 24.2,11.5 24.8,11.5 25.4,11.5 26,11.5 26.6,11.5 27.2,11.5 27.8,11.5 36.1,11.5 41.975,12 45.025,12 53.975,12 57.025,12 91.975,12 95.025,12 23.6,12.1 24.2,12.1 24.8,12.1 25.4,12.1 26,12.1 26.6,12.1 27.2,12.1 27.8,12.1 23.6,12.7 24.2,12.7 24.8,12.7 25.4,12.7 26,12.7 26.6,12.7 27.2,12.7 27.8,12.7 5.2,13 42.422,13.078 44.578,13.078 54.422,13.078 56.578,13.078 92.422,13.078 94.578,13.078 23.6,13.3 24.2,13.3 24.8,13.3 25.4,13.3 26,13.3 26.6,13.3 27.2,13.3 27.8,13.3 43.5,13.525 55.5,13.525 93.5,13.525 13.9,13.9 23.6,13.9 24.2,13.9 24.8,13.9 25.4,13.9 26,13.9 26.6,13.9 27.2,13.9 27.8,13.9 45,15.1 8.4,15.4 11.6,15.6 0.675,16.8 1.275,16.8 0.675,17.4 1.275,17.4 49.5,17.5 50.1,17.5 8.2,17.7 12,17.7 49.5,18.1 50.1,18.1 2.8,18.2 19.5,18.3 42.8,18.7 43.4,18.7 36.6,19.2 42.8,19.3 43.4,19.3 26.1,19.8 8.3,19.9 2.5,19.975 97.5,19.975 1.422,20.422 3.578,20.422 96.422,20.422 98.578,20.422 29.9,21.2 37.4,21.2 33.8,21.3 7.2,21.4 22.8,21.4 53.4,21.4 54,21.4 0.975,21.5 4.025,21.5 25.9,21.5 95.975,21.5 99.025,21.5 53.4,22 54,22 1.422,22.578 3.578,22.578 96.422,22.578 98.578,22.578 45.5,22.9 2.5,23.025 97.5,23.025
GPIO0: JMS583.3 W25X20.2 | length 30.7
  Top Layer w0.15: W25X20.2@6.295,4.735 9.465,4.735 10.1,4.1 16.172,4.1 18.147,2.125 23.425,2.125 v1(24,2.7) ; JMS583.3@29.7,9.6 30.578,9.6 30.778,9.4 v1(30.9,9.4)
  Bottom Layer w0.15: v1(24,2.7) 25.45,4.15 26.754,4.15 31,8.396 31,8.878 30.986,8.892 30.986,9.314 v1(30.9,9.4)
GPIO1: JMS583.4 W25X20.6 | length 26.6
  Top Layer w0.15: W25X20.6@11.705,3.465 12.509,3.465 12.844,3.8 16.09,3.8 18.035,1.855 24.005,1.855 v1(24.8,2.65) ; JMS583.4@29.7,10 30.578,10 30.778,10.2 v1(30.9,10.2)
  Bottom Layer w0.15: v1(24.8,2.65) 26.03,3.88 26.866,3.88 31.4,8.414 31.4,9.7 v1(30.9,10.2)
GPIO2: JMS583.5 W25X20.5 | length 28.3
  Top Layer w0.15: W25X20.5@11.705,2.195 12.396,2.195 13.731,3.53 15.978,3.53 17.923,1.585 24.535,1.585 v1(25.6,2.65) ; JMS583.5@29.7,10.4 30.4,10.4 30.695,10.695 31.205,10.695 v1(31.7,10.2)
  Bottom Layer w0.15: v1(25.6,2.65) 26.56,3.61 26.978,3.61 31.7,8.332 v1(31.7,10.2)